# Altium PCB E1811EDGEPCBA2.PcbDoc
Units mil, origin at the board's own origin, x right, y up, seen from the top; angles counter-clockwise.
Board outline 1500 x 1500 mil, 2 copper layers (Top Layer, Bottom Layer); 21 components, 46 nets, 76 pads, 10 vias.
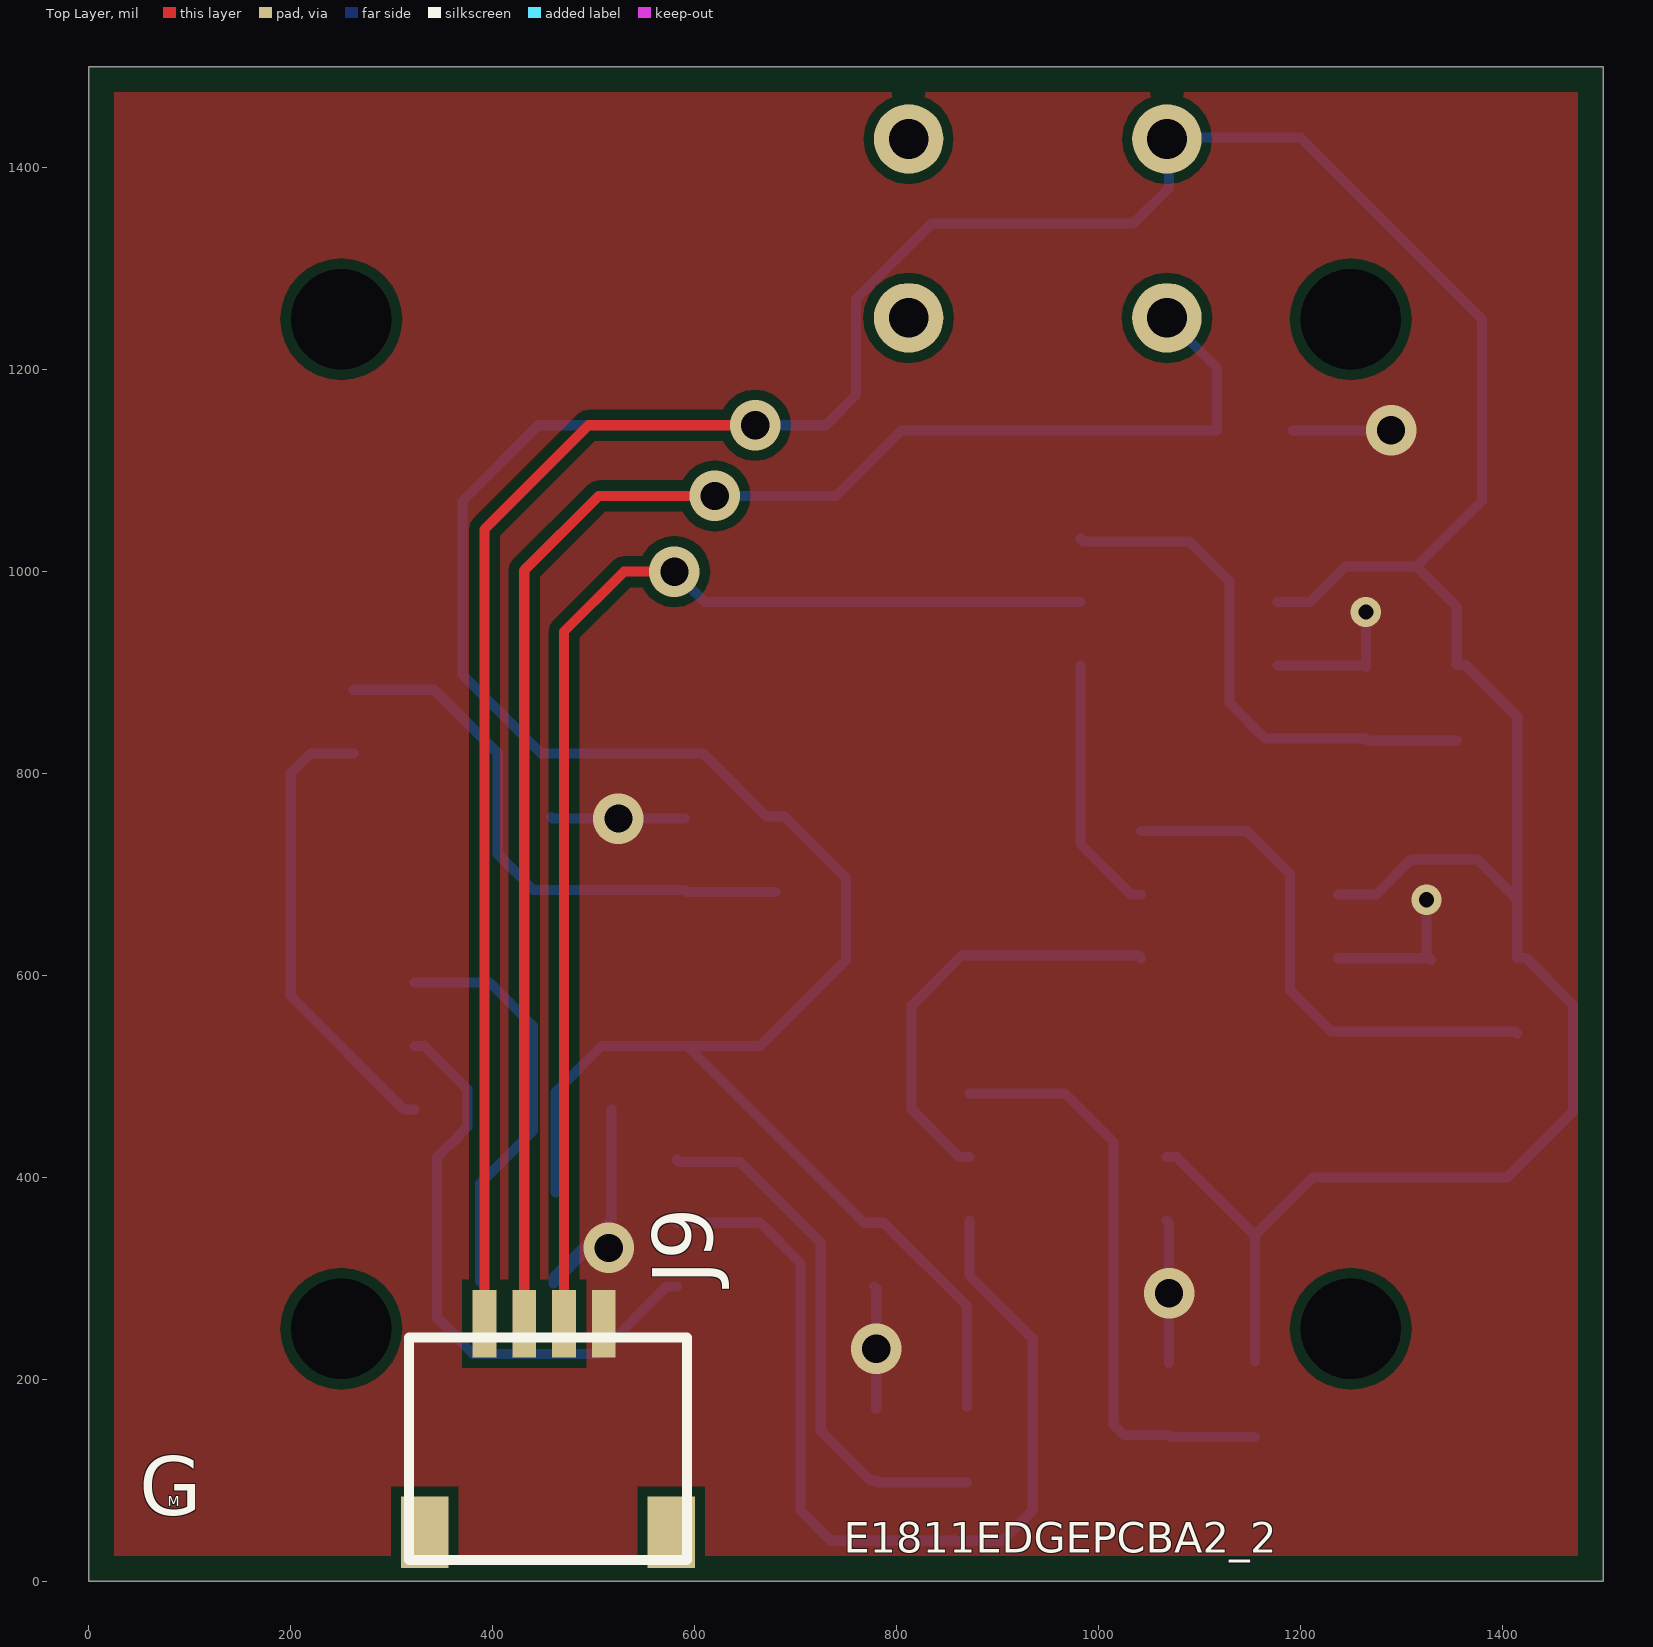
[diagram p0: Top Layer view]
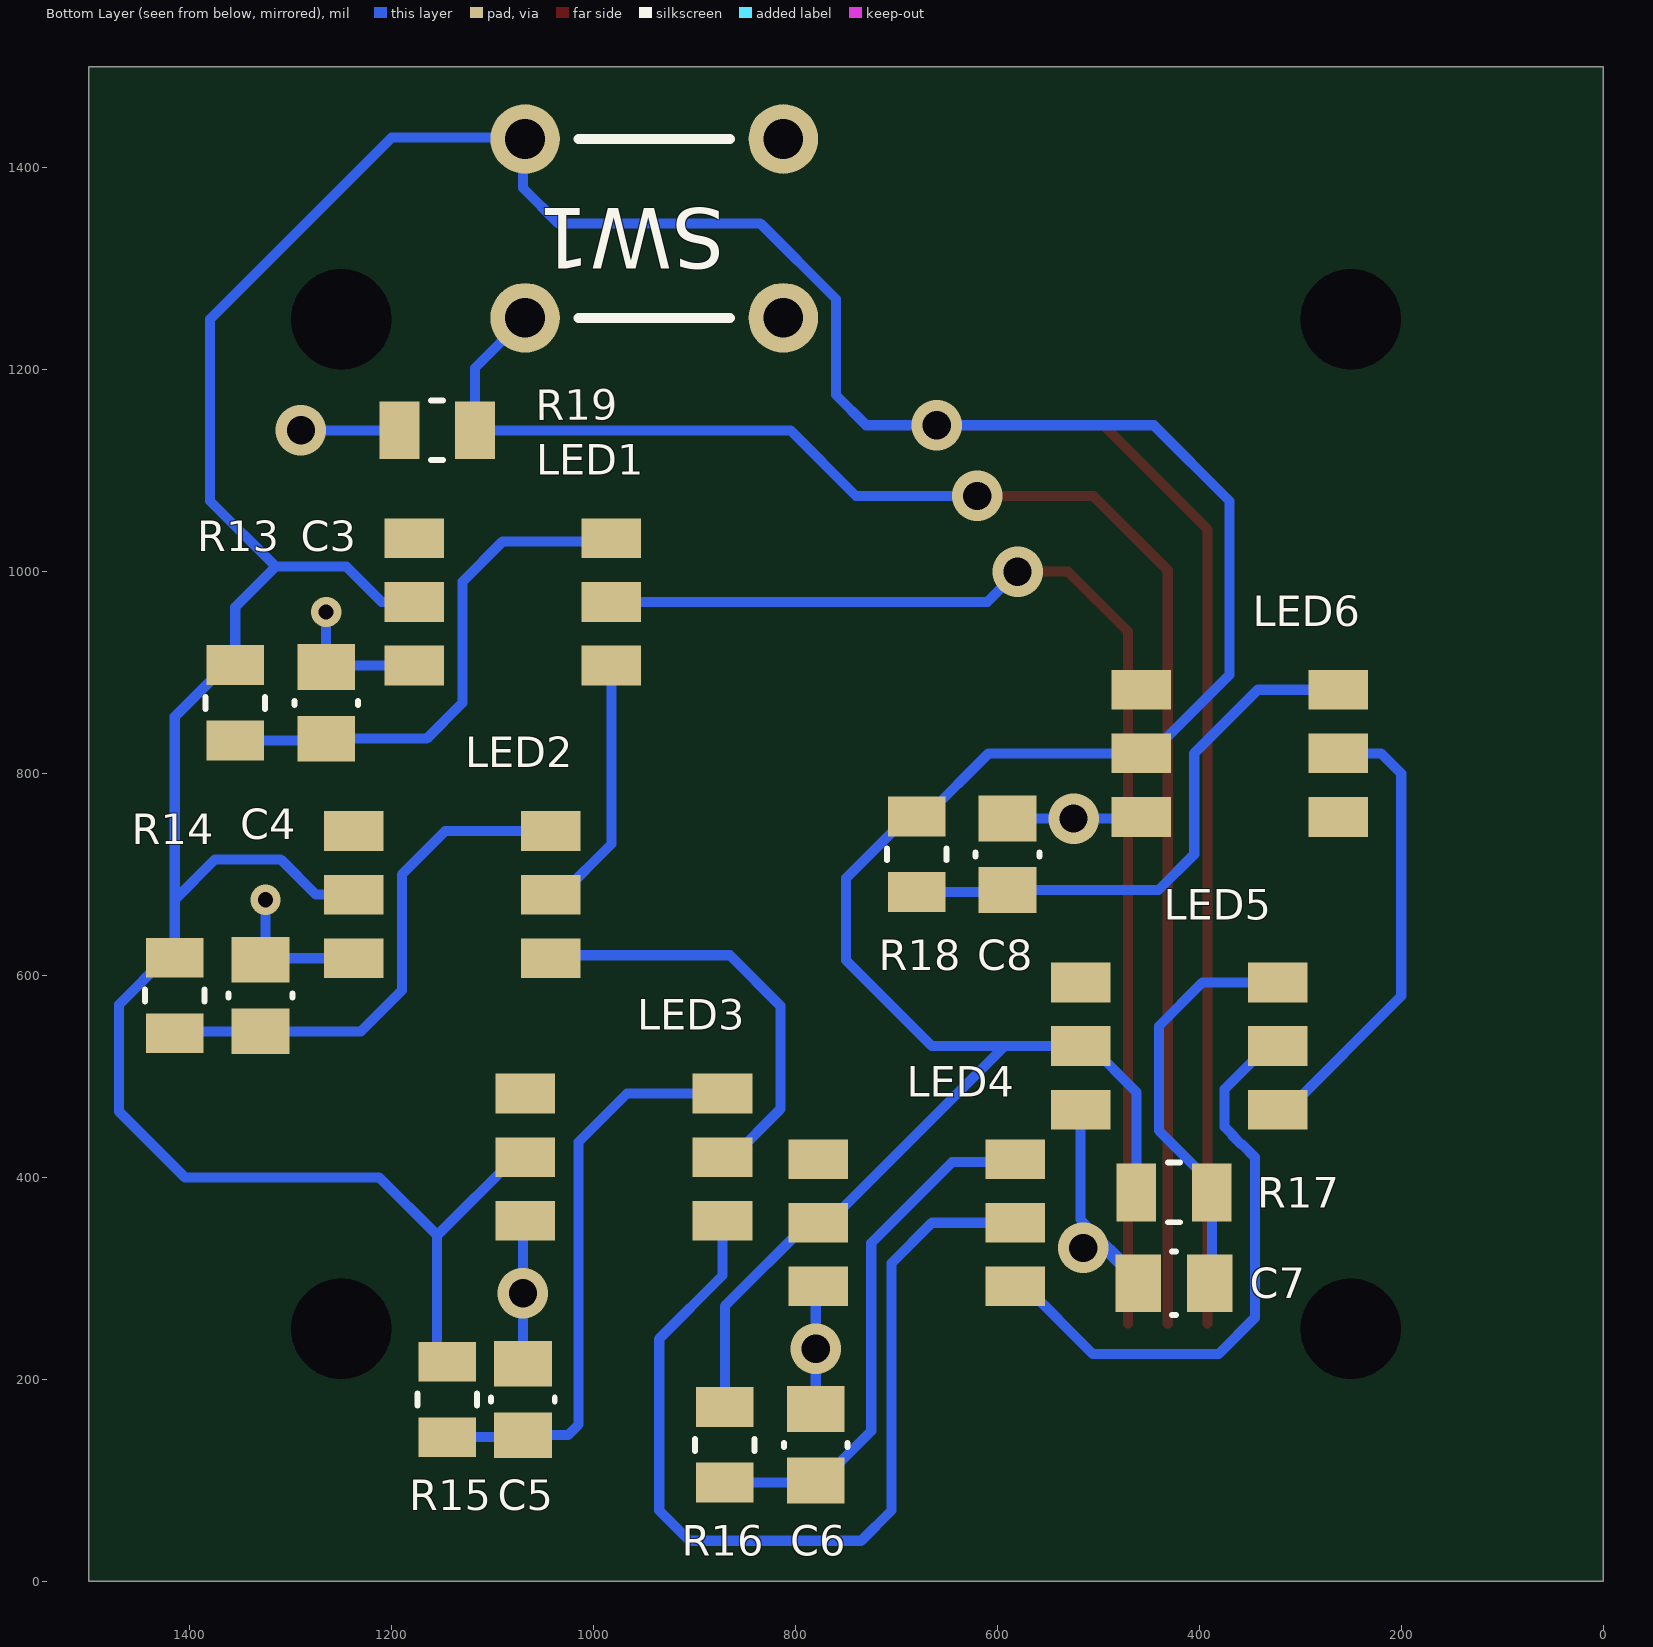
[diagram p1: Bottom Layer view, seen from below]
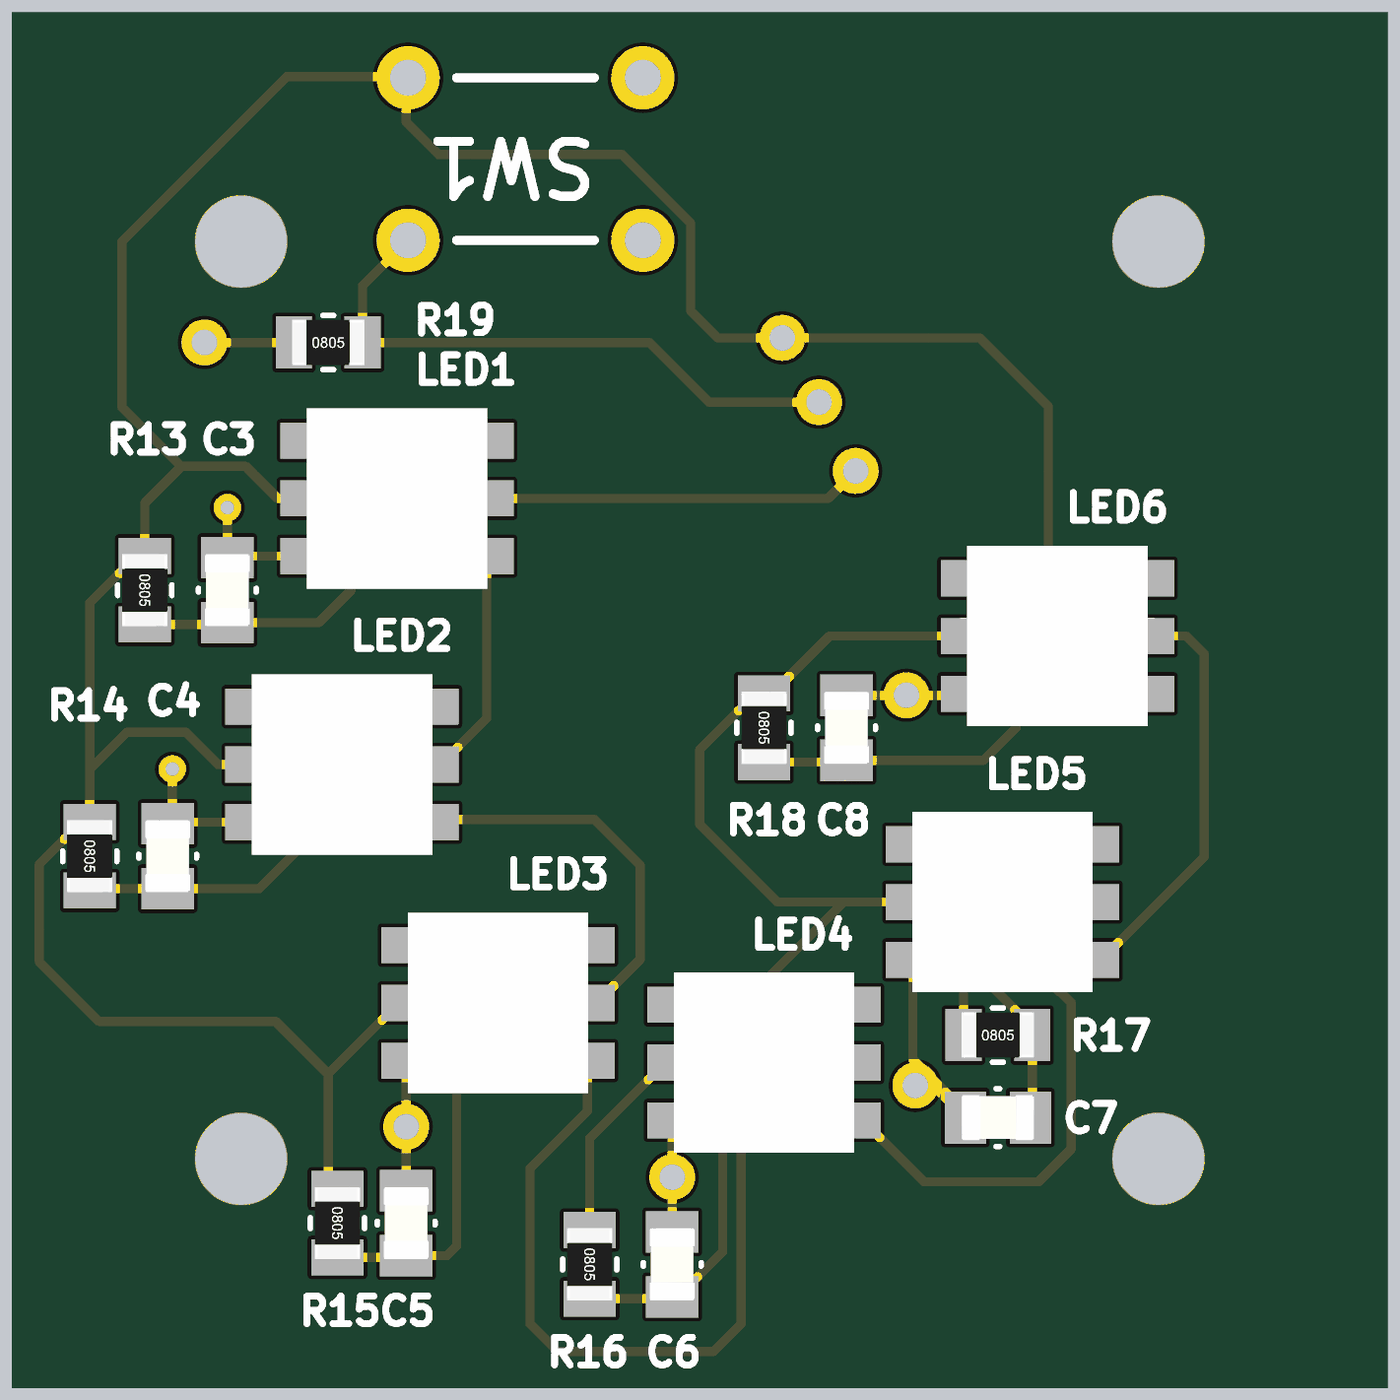
[diagram p2: 3D render of the assembled board from below, using the file's embedded part models]

## Layer stack, top to bottom
Top Solder: solder mask 0.4, Solder Resist, Dk 3.5
Top Layer: signal copper 1.4
Dielectric 1: dielectric 12.6, FR-4, Dk 4.8
Bottom Layer: signal copper 1.4
Bottom Solder: solder mask 0.4, Solder Resist, Dk 3.5

## Board outline
0,0 0,1500 1500,1500 1500,0

## Design rules (kind name [scope] priority, off if disabled: settings)
Clearance [All] p1: gap=10 ignorepadtopadclearanceinfootprint=FALSE except(0: Arc-Hole Track-Hole SMDPad-Hole THPad-Hole Via-Hole Fill-Hole Poly-Hole Region-Hole Text-Hole)
PlaneConnect [All] p1: planeconnectstyle=Direct reliefexpansion=20 reliefentries=4 reliefconductorwidth=10 reliefairgap=10
PolygonConnect [All] p1: connectstyle=Direct reliefconductorwidth=10 reliefentries=4 polygonreliefangle="90 Angle" airgapwidth=10
RoomDefinition Sheet1 [InComponentClass('Sheet1')] p1: confinementstyle=ConfineIn formatcopy=TRUE lockcomponents=FALSE outline 6045,55 20950,55 20950,2145 6045,2145
RoutingVias [All] p1: holewidth=28 width=50 viastyle="Through Hole" minholewidth=28 minwidth=50 maxholewidth=28 maxwidth=50
SolderMaskExpansion [All] p1: expansion=4 istentingtop=FALSE
Width [All] p1: maxlimit=10 minlimit=10 preferedwidth=10
29 further rules are at their usual default settings.

## Components (designator, comment, footprint, x,y, rotation, side; value= is the part's Value field where it differs from the comment)
C3 "0.1uF" CAPC2012N 1265,870 r270 bottom
C4 "0.1uF" CAPC2012N 1330,580 r270 bottom
C5 "0.1uF" CAPC2012N 1070,180 r270 bottom
C6 "0.1uF" CAPC2012N 780,135 r270 bottom
C7 "0.1uF" CAPC2012N 425,295 r180 bottom
C8 "0.1uF" CAPC2012N 590,720 r270 bottom
J9 "84981-4" 84981-4 317.09,20.75 r0 top
LED1 "WS2812" WS2812 1080,970 r180 bottom
LED2 "WS2812" WS2812 1140,680 r180 bottom
LED3 "WS2812" WS2812 970,420 r180 bottom
LED4 "WS2812" WS2812 680,355 r180 bottom
LED5 "WS2812" WS2812 420,530 r180 bottom
LED6 "WS2812" WS2812 360,820 r180 bottom
R13 "150" RESC2012N 1355,870 r270 bottom
R14 "150" RESC2012N 1415,580 r270 bottom
R15 "150" RESC2012N 1145,180 r270 bottom
R16 "150" RESC2012N 870,135 r270 bottom
R17 "150" RESC2012N 425,385 r180 bottom
R18 "150" RESC2012N 680,720 r270 bottom
R19 "10K" RESC2012N 1155,1140 r180 bottom
SW1 "PTS645SL50-2 LFS" "PTS645SL50-2 LFS" 940,1340 r180 bottom

## Footprints (in the part's own frame and the unit in brackets; to place one, negate y for a bottom-side part, rotate by r counter-clockwise, add the part's x,y. Pads: shape width x height; smd on the part's side, far side on the other; paste and mask are expansions set on the pad)
84981-4 [mm]
  rect 1.2x1.8 smd: 0(0.4,0.7) 0(6.6,0.7)
  rect 0.6x1.7 smd: 1(1.9,5.95) 2(2.9,5.95) 3(3.9,5.95) 4(4.9,5.95)
  silkscreen extent 0,0 7,5.6, body extent -0.1,0.1 6.9,6.4, height 3
CAPC2012N [mm] "Chip Capacitor, Body 2.0x1.3mm, IPC Med Density"
  rect 1.15x1.45 smd: 1(-0.9,0) 2(0.9,0)
  silkscreen extent -0.05,-0.8 0.05,0.8, body extent -1,-0.62 1,0.63, height 0.78
"PTS645SL50-2 LFS" [mm]
  round 1.75 hole 1: 1(-3.25,2.25) 2(3.25,2.25) 3(-3.25,-2.25) 4(3.25,-2.25)
  silkscreen extent -1.91,-2.25 1.91,2.25, body extent -3.25,-2.92 3.25,2.92, height 3.45
RESC2012N [mm] "Chip Resistor, Body 2.0x1.3mm, IPC Med Density"
  rect 1x1.45 smd: 1(-0.95,0) 2(0.95,0)
  silkscreen extent -0.15,-0.75 0.15,0.75, body extent -1,-0.62 1,0.63, height 0.59
WS2812 [mm]
  rect 1.5x1 smd: 1(2.48,-1.6) 2(2.48,0) 3(2.48,1.6) 4(-2.48,1.6) 5(-2.48,0) 6(-2.48,-1.6)
  body extent -2.7,-2.5 2.7,2.5, height 1

## Part data
C3 C4 C5 C6 C7 C8: library part Cap_0.1uF_50V_0805, "CAP CER 0.1UF 50V", Capacitance=100nF, Case Code (Imperial)=0805, Case Code (Metric)=2012, Dielectric=X7R, Dielectric Material=Ceramic, Manufacturer=KEMET, Manufacturer P/N=C0805C104M5RACAUTO, Max Operating Temperature=125°C, Min Operating Temperature=-55°C, Ratings=AEC-Q200, Supplier Part Number 1=399-12977-1-ND, Tolerance=20%, Voltage Rating=50V, Case/Package=0805, Contact Plating=Matte,Tin, Depth=1.25mm, Length=2mm, Mount="Surface Mount", REACH SVHC="No SVHC", Supplier 1=Digi-Key, Termination=Wraparound, Thickness=0.035inch, Voltage Rating (DC)=50V, Width=0.049inch
J9: Supplier Part Number 1=A101369CT-ND, Supplier 1=Digi-Key
R13 R14 R15 R16 R17 R18: library part Res_150_0805, "RES 150 OHM 1/8W 1% 0805", Case Code (Imperial)=0805, Case Code (Metric)=2012, Manufacturer=Vishay, Manufacturer P/N=CRCW0805150RFKEA, Max Operating Temperature=155°C, Max Power Dissipation=125mW, Min Operating Temperature=-55°C, Package Quantity=10, Resistance=150R, Supplier Part Number 1=541-150CCT-ND, Temperature Coefficient=100ppm/°C, Tolerance=1%, Voltage Rating=150V, Case/Package=0805, ComponentLink3Description=http://www.vishay.com/docs/20035/dcrcwe3.pdf, ComponentLink3URL=http://www.vishay.com/docs/20035/dcrcwe3.pdf, Composition="Thick Film", Contact Plating=Tin, Depth=1.25mm, Features="Automotive AEC-Q200", Height=0.45mm, Lead Free="Lead Free", Length=2mm, Military Standard=Not, Mount="Surface Mount", Power Rating=125mW, Radiation Hardening=No, REACH SVHC=Unknown, Supplier 1=Digi-Key, Termination=SMD/SMT, Voltage Rating (DC)=150V, Weight=0.000194oz, Width=0.049inch
R19: library part Res_10K_0805, "RES 10K OHM 1/8W 1% 0805", Case Code (Imperial)=0805, Case Code (Metric)=2012, Manufacturer=Vishay, Manufacturer P/N=CRCW080510K0FKEA, Max Operating Temperature=155°C, Min Operating Temperature=-55°C, Package Quantity=5000, Power Rating=125mW, Resistance=10kR, Supplier Part Number 1=541-10.0KCCT-ND, Temperature Coefficient=100ppm/°C, Tolerance=1%, Voltage Rating=150V, Case/Package=0805, ComponentLink4Description=http://www.vishay.com/docs/20035/dcrcwe3.pdf, ComponentLink4URL=http://www.vishay.com/docs/20035/dcrcwe3.pdf, Composition="Thick Film", Contact Plating=Tin, Depth=1.25mm, Height=0.45mm, Lead Free="Lead Free", Length=2mm, Military Standard=Not, Radiation Hardening=No, REACH SVHC=Unknown, Supplier 1=Digi-Key, Termination=SMD/SMT, Voltage Rating (DC)=150V, Weight=0.000194oz, Width=1.25mm

## Free pads (board coordinates)
  round 60 hole 100: 0(250,250) 0(250,1250) 0(1250,250) 0(1250,1250)

## Via types
v1: diameter 50, hole 28, Top Layer to Bottom Layer, 8 vias
v2: diameter 30, hole 15, Top Layer to Bottom Layer, 2 vias

## Nets (pads, with @x,y where several pads share a name; then routed paths per layer and width w, separated by ;. In a path a pad name is that pad's centre, name@x,y a point inside that pad or via, vN(x,y) a via of type N, cw(c..) or ccw(c..) an arc to the next point about the centre after c; other vN are vias at no path point)
GND: C3.1 C4.1 C5.1 C6.1 C7.1 C8.1 J9.4 LED1.6 LED2.6 LED3.6 LED4.6 LED5.6 LED6.6 R19.1 | length 1050.5
  Bottom Layer w10: LED6.6 459.21,755.43 C8.1 ; v1(515,330) 495.43,330 C7.1 460.43,300.91 517.64,358.11 LED5.6 ; LED4.6 780,289.65 C6.1 ; LED3.6 1070,354.65 C5.1 ; LED1.6 1263.43,907.01 C3.1 v2(1265,960) ; R19.1 v1(1290,1140) ; LED2.6 C4.1@1328.43,617.01 ; v2@1325,670 1325,620.43 C4.1@1328.43,617.01 ; C4.1 C4.1@1328.43,617.01
  other v1: 780,230.04 1070,285.04 524.61,755.43
  other v2: 1325,675
GND_HOUS: 
NetC3_2: C3.2 LED1.3 R13.2 | length 525.9
  Bottom Layer w10: LED1.3 985.35,1030 1090,1030 1130,990 1130,870 1165.43,834.57 C3.2 1266.97,832.6 R13.2
NetC4_2: C4.2 LED2.3 R14.2 | length 523
  Bottom Layer w10: LED2.3 1147.01,742.99 1190,700 1190,585 1230.43,544.57 C4.2 1413.03,544.57 R14.2
NetC5_2: C5.2 LED3.3 R15.2 | length 587.7
  Bottom Layer w10: LED3.3 967.01,482.99 1015,435 1015,155 1025.43,144.57 C5.2 1071.97,142.6 R15.2@1155,142.6
NetC6_2: C6.2 LED4.3 R16.2 | length 529.5
  Bottom Layer w10: LED4.3 585.35,415 645,415 725,335 725,148.66 774.09,99.57 C6.2 781.97,97.6 R16.2
NetC7_2: C7.2 LED5.3 R17.2 | length 413
  Bottom Layer w10: LED5.3 397.01,592.99 440,550 440,446.26 387.6,393.86 R17.2 387.6,296.97 C7.2
NetC8_2: C8.2 LED6.3 R18.2 | length 559.2
  Bottom Layer w10: LED6.3 342.01,882.99 405,820 405,720 440.43,684.57 C8.2 591.97,682.6 R18.2
NetJ1_1: 
NetJ1_3: 
NetJ3_1: 
NetJ3_2: 
NetJ3_3: 
NetJ4_1: 
NetJ4_2: 
NetJ4_3: 
NetJ4_4: 
NetJ4_5: 
NetJ4_6: 
NetJ4_7: 
NetJ4_8: 
NetJ4_9: 
NetJ4_10: 
NetJ4_11: 
NetJ6_1: 
NetJ6_2: 
NetJ6_3: 
NetJ6_4: 
NetJ6_5: 
NetJ6_6: 
NetJ6_7: 
NetJ6_8: 
NetJ6_9: 
NetJ6_10: 
NetJ6_13: 
NetJ7_13: 
NetJ8_2: J9.2 R19.2 SW1.3 | length 1622.5
  Top Layer w10: J9.2 431.26,1001.26 505,1075 v1(620,1075) v1@619.69,1075.31
  Bottom Layer w10: v1(620,1075) 740,1075 805,1140 R19.2 1117.6,1201.77 SW1.3
NetJ8_3: J9.3 LED1.2 | length 1234.4
  Top Layer w10: J9.3 470.63,940.63 530,1000 v1(580,1000)
  Bottom Layer w10: v1(580,1000) 610,970 LED1.2
NetLED1_1: LED1.1 LED2.2 | length 257.6
  Bottom Layer w10: LED1.1 982.36,730.16 1032.52,680 LED2.2
NetLED2_1: LED2.1 LED3.2 | length 428.8
  Bottom Layer w10: LED3.2 862.52,420 815,467.52 815,570 865,620 1039.37,620 LED2.1
NetLED3_1: LED3.1 LED4.2 | length 952
  Bottom Layer w10: LED4.2 665,355 705,315 705,70 735,40 905,40 935,70 935,240 872.36,302.64 LED3.1
NetLED4_1: LED4.1 LED5.2 | length 589.6
  Bottom Layer w10: LED5.2 332.2,530 375,487.2 375,450 366.89,441.89 366.89,441.11 358.1,432.32 357.32,432.32 345,420 345,260.86 380.86,225 505.51,225 572.52,292.01 LED4.1
NetLED5_1: LED5.1 LED6.2 | length 460.1
  Bottom Layer w10: LED6.2 220,820 200,800 200,579.53 312.52,467.01 LED5.1
NetPSU1_1: 
NetQ1_3: 
VCC: J9.1 LED1.5 LED2.5 LED3.5 LED4.5 LED5.5 LED6.5 R13.1 R14.1 R15.1 R16.1 R17.1 R18.1 SW1.1 | length 5908.1
  Top Layer w10: J9.1 391.89,1041.89 495,1145 658.74,1145 659.37,1145.63 v1(660,1145)
  Bottom Layer w10: R17.1 462.4,484.61 507.8,530 LED5.5 592.8,530 ; R16.1 870,272.48 787.48,355 LED4.5 767.8,355 592.8,530 ; LED3.5 1077.48,420 1155,342.48 ; SW1.1@1067.95,1430 1200,1430 1380,1250 1380,1070 1315,1005 ; SW1.1@1070,1420 1070,1380 1035,1345 835,1345 760,1270 760,1175 730,1145 v1(660,1145) 445,1145 370,1070 370,897.8 447.8,820 LED6.5 608.54,820 671.14,757.4 R18.1 688.86,757.4 750,696.26 750,615 665,530 592.8,530 ; R15.1@1155,217.4 1155,342.48 ; LED1.5 1210,970 1245,1005 1315,1005 ; LED2.5 1275,680 1310,715 1375,715 1415,675 ; 1155,342.48 1212.52,400 1405,400 1470,465 1470,571.26 1423.86,617.4 R14.1 1415,675 ; 1315,1005 1355,965 R13.1 1363.86,907.4 1415,856.26 1415,675
pads on no net: J9.0 LED1.4 LED2.4 LED3.4 LED4.4 LED5.4 LED6.1 LED6.4 SW1.2 SW1.4

## Polygon pours and split planes (outlines as drawn)
GND on Top Layer "GND_L01_P000" (solid, pour order 0): 25,1475 1475,1475 1475,25 25,25

## Silkscreen, mask and mechanical layers (free items; w line width, h text height)
Top Overlay:
  text "M" at 78,74 h10
  text "G" at 50,45.74 h100
  text "E1811EDGEPCBA2_2" at 748,28 h30
Mechanical 1:
  the board outline again, w10